# Altium PCB board.PcbDoc
Units mm, origin at the board's own origin, x right, y up, seen from the top; angles counter-clockwise.
Board outline 77 x 77 mm, 2 copper layers (Top Layer, Bottom Layer); 14 components, 20 nets, 100 pads, 2 vias.
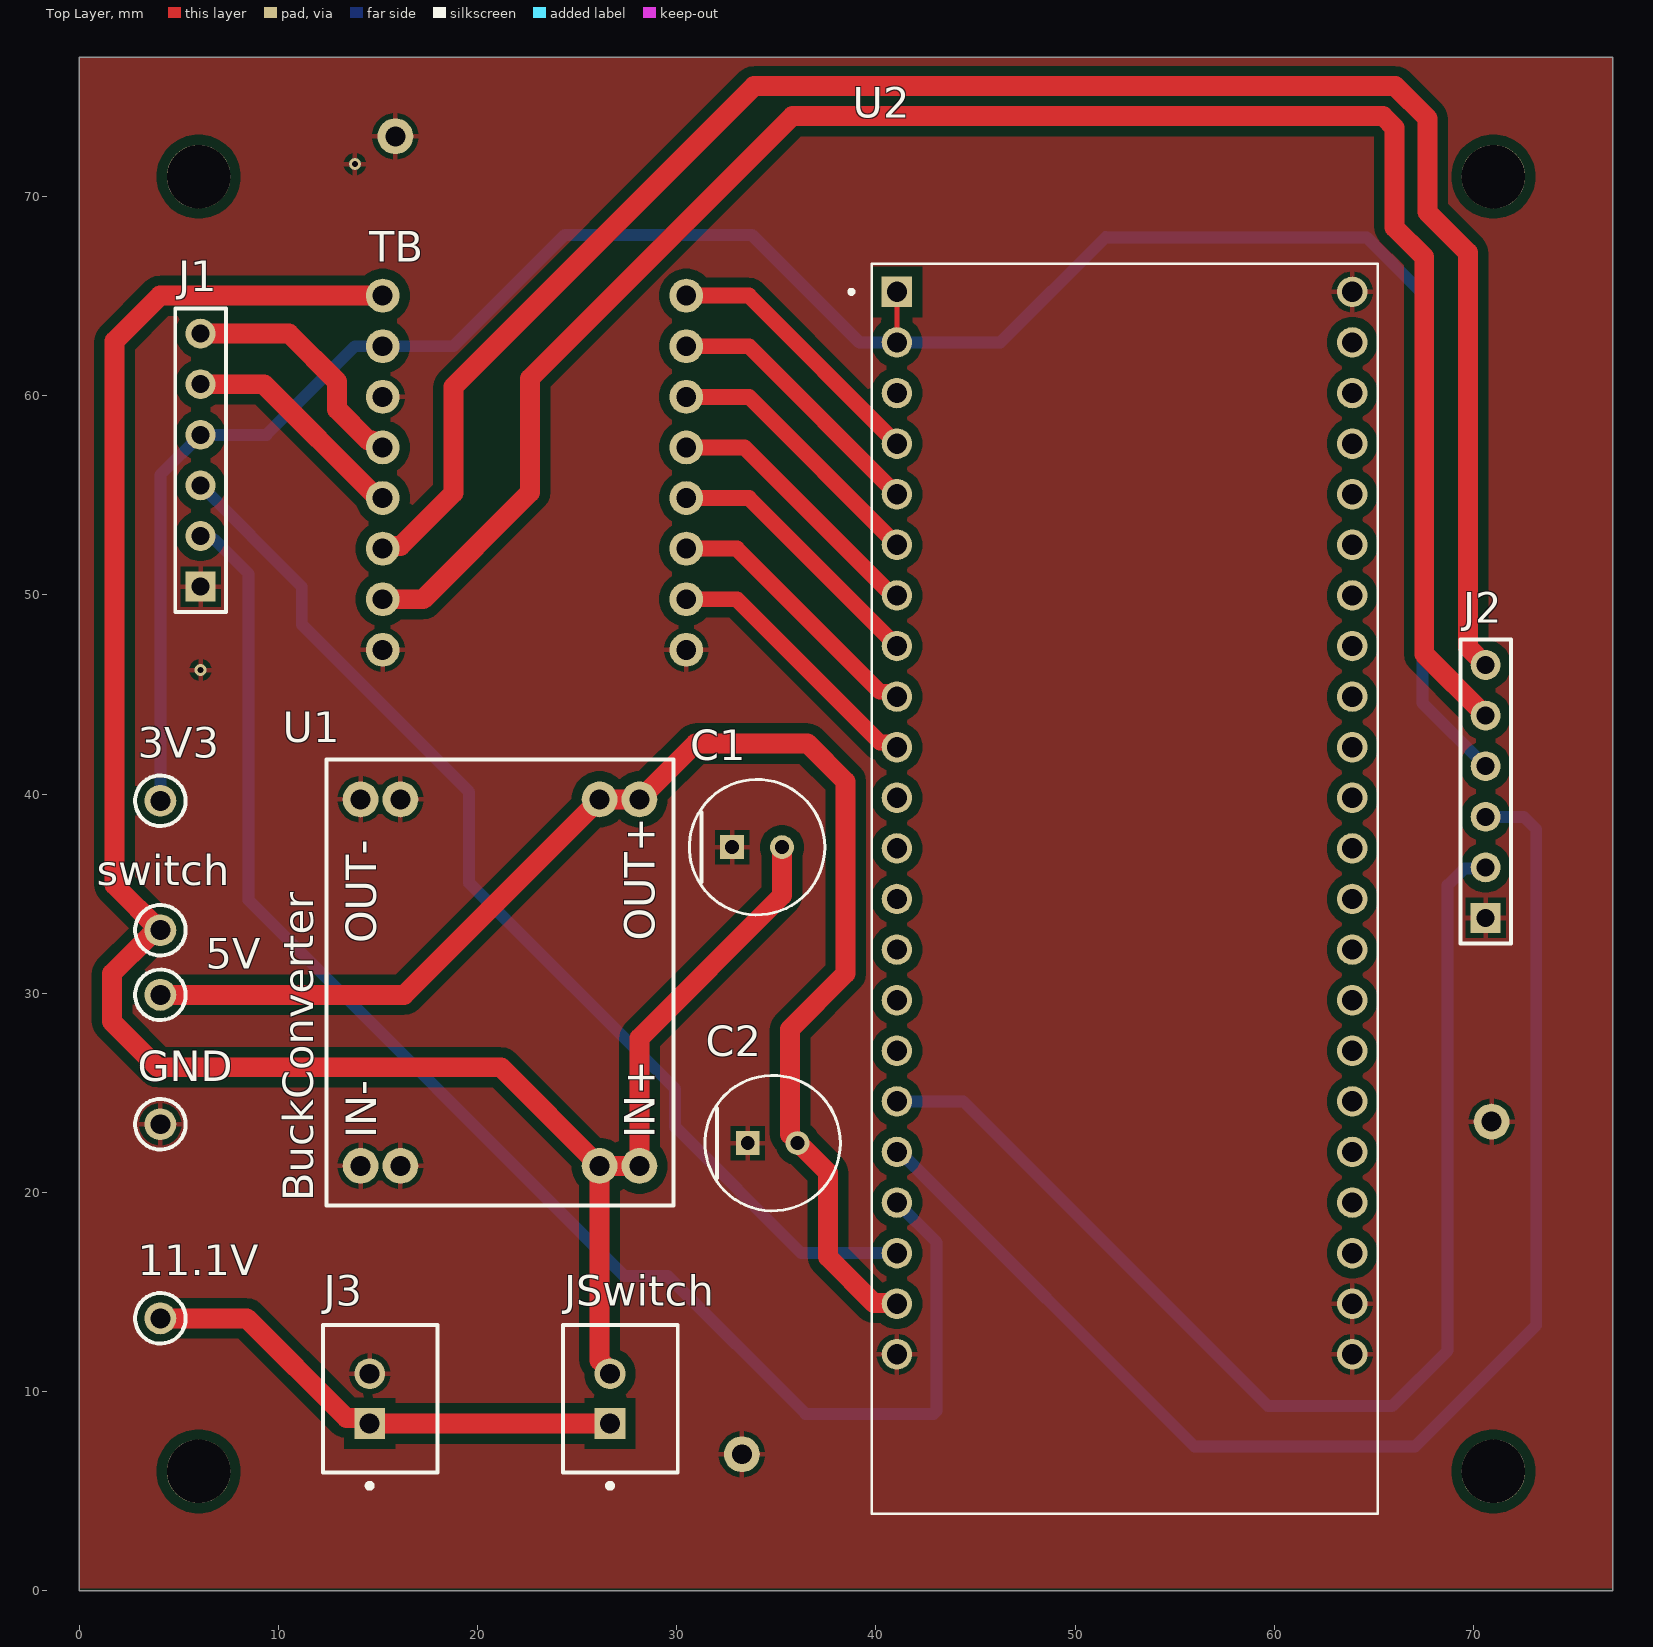
[diagram p0: Top Layer view]
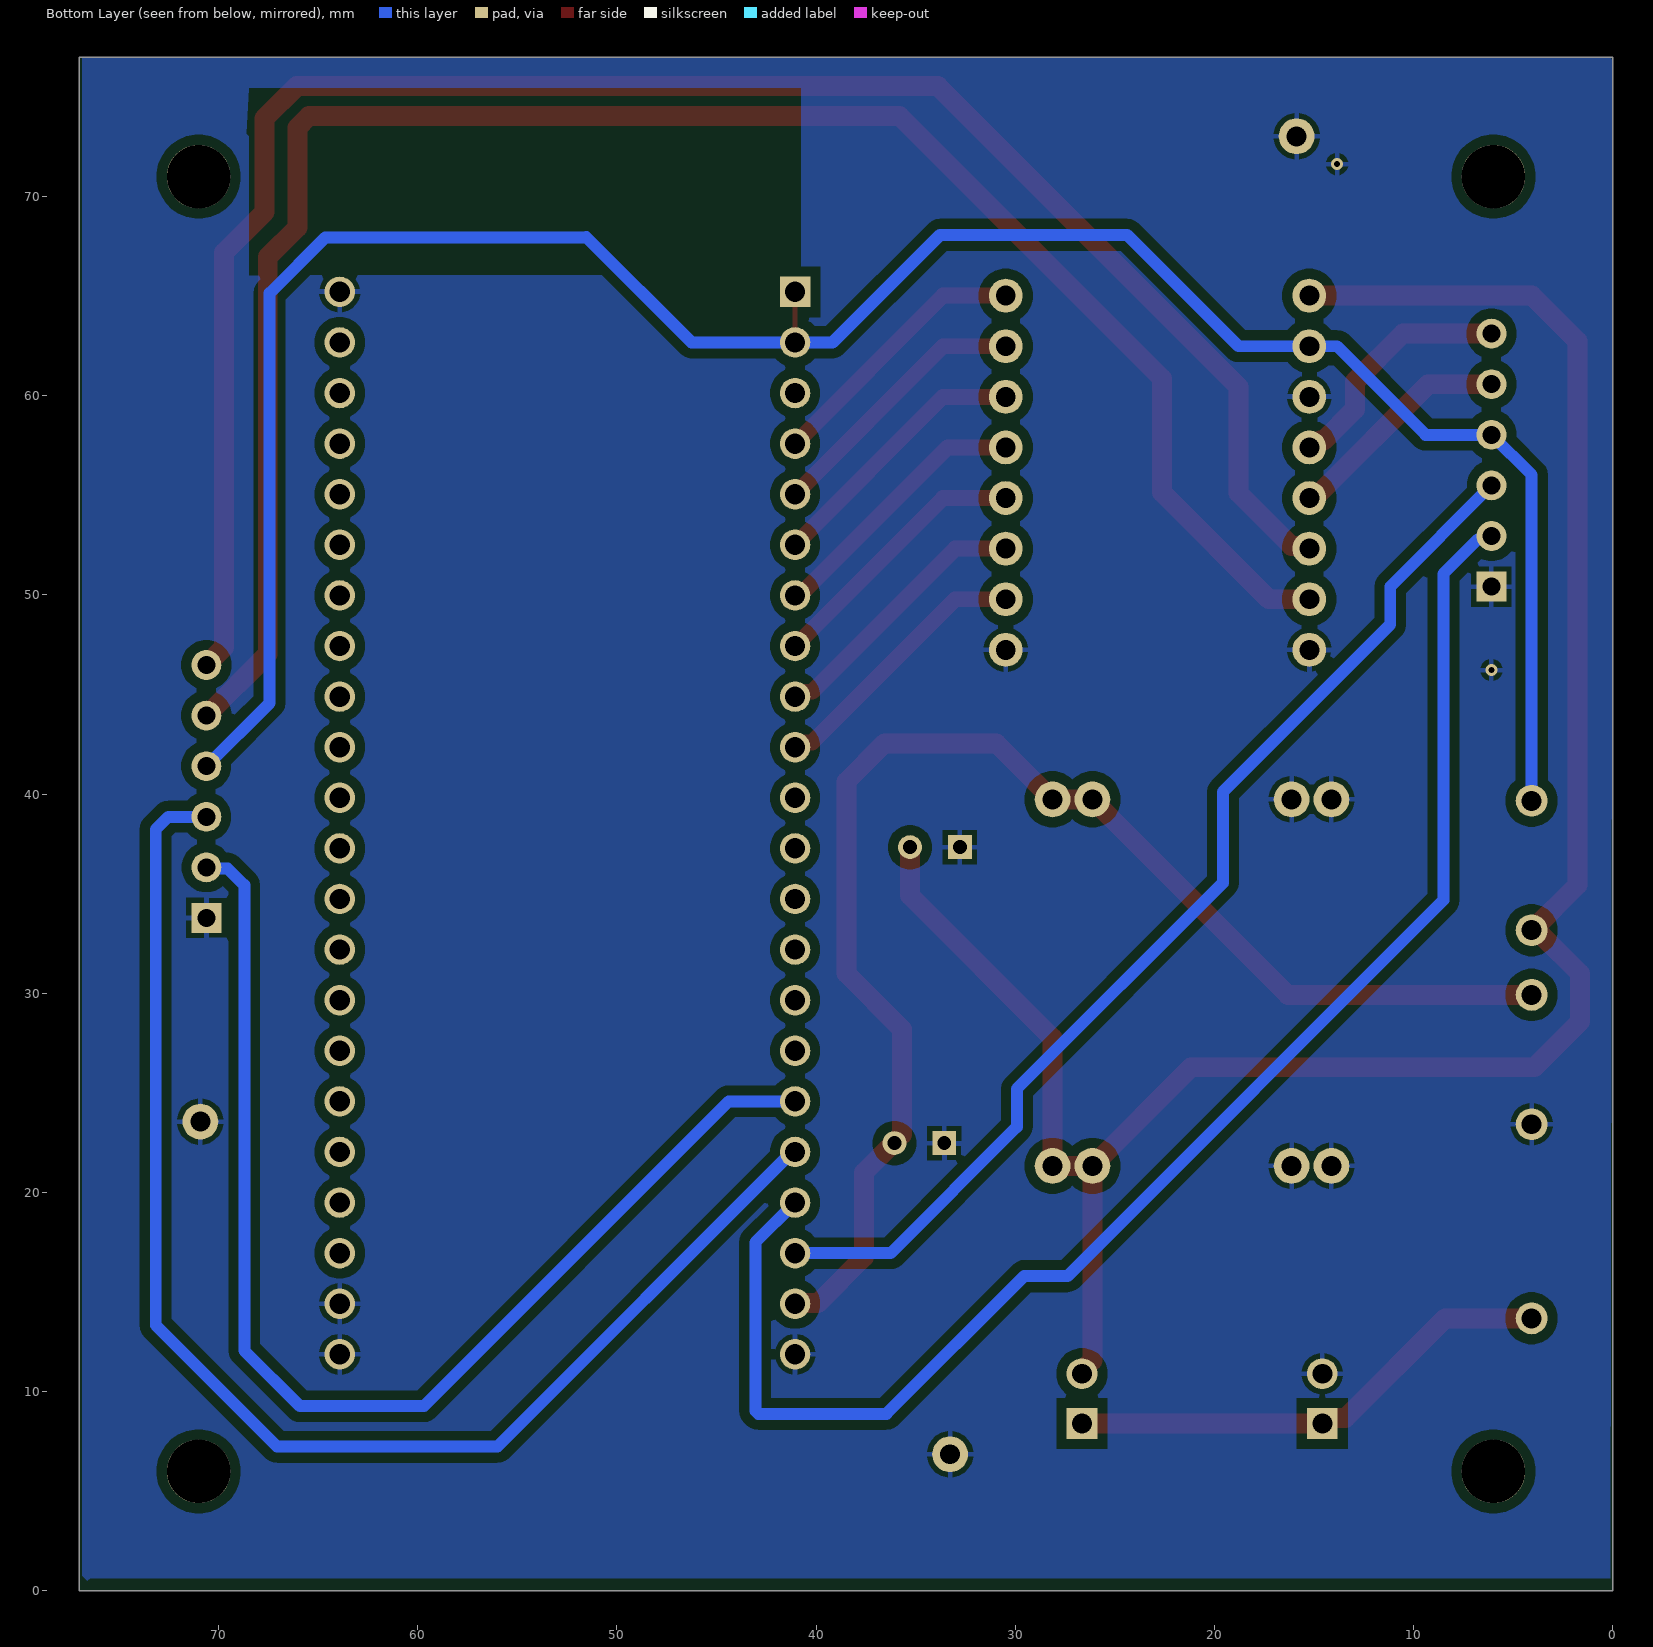
[diagram p1: Bottom Layer view, seen from below]
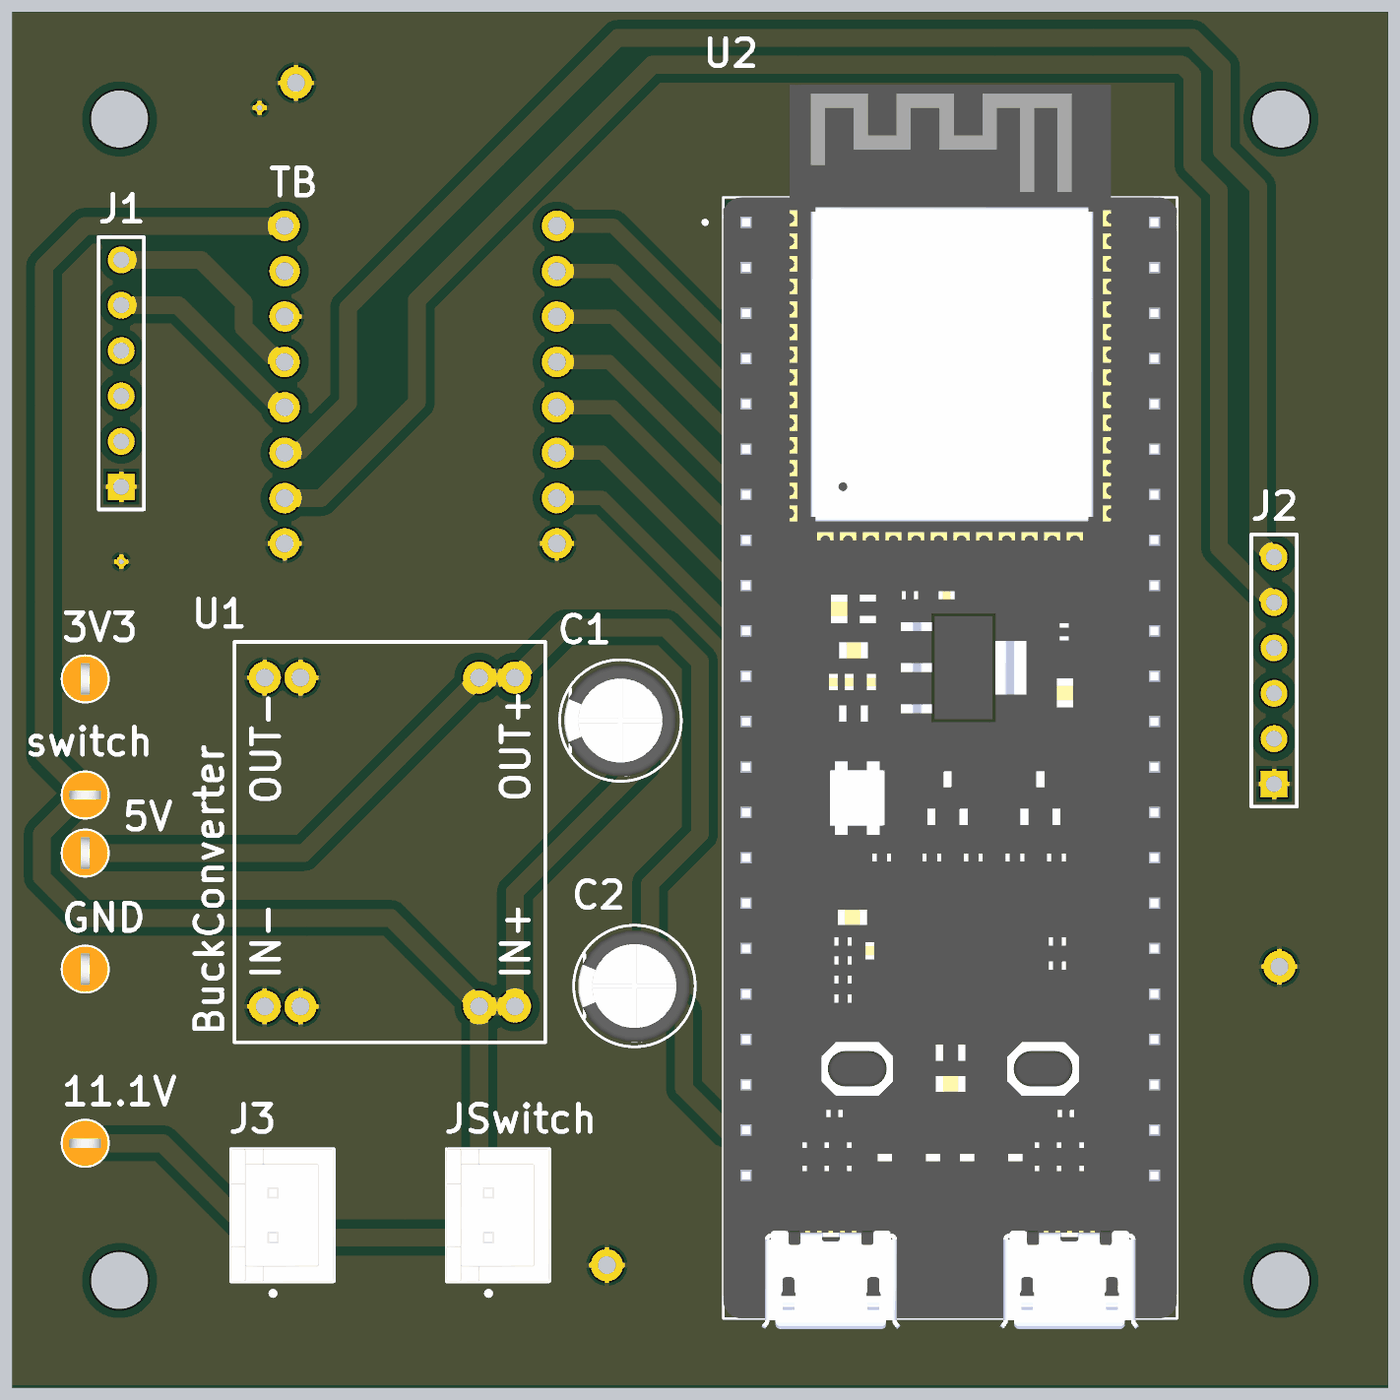
[diagram p2: 3D render of the assembled board from above, using the file's embedded part models]

## Layer stack, top to bottom
Top Solder: solder mask 0.0102, Solder Resist, Dk 3.5
Top Layer: signal copper 0.0356
Dielectric 1: dielectric 0.32, FR-4, Dk 4.8
Bottom Layer: signal copper 0.0356
Bottom Solder: solder mask 0.0102, Solder Resist, Dk 3.5

## Board outline
0,0 77,0 77,77 0,77

## Design rules (kind name [scope] priority, off if disabled: settings)
Clearance [All] p1: gap=0.5 ignorepadtopadclearanceinfootprint=FALSE
HoleSize [All] p1: absolutevalues=TRUE maxlimit=4 minlimit=0.025 maxpercent=80.000 minpercent=20.000
PolygonConnect [All] p1: connectstyle=Relief reliefconductorwidth=0.254 reliefentries=4 polygonreliefangle="90 Angle" airgapwidth=0.254
RoutingVias [All] p1: holewidth=0.711 width=1.27 viastyle="Through Hole" minholewidth=0.711 minwidth=1.27 maxholewidth=0.711 maxwidth=1.27
SolderMaskExpansion [All] p1: expansion=0.102 istentingtop=FALSE
SupplyNets "Schematic Supply Nets" [InNet('GND')] p1: voltage=0.000
Width Power_Width [InNetClass('Power')] p1: maxlimit=1.5 minlimit=0.8 preferedwidth=1 minimp=50.000000 maximp=50.000000 favimp=50.000000
Width [All] p2: maxlimit=1.2 minlimit=0.2 preferedwidth=0.254 minimp=50.000000 maximp=50.000000 favimp=50.000000
29 further rules are at their usual default settings.

## Classes and differential pairs
net class Power: 5V A01 A02 B01 B02 VS VV

## Components (designator, comment, footprint, x,y, rotation, side; value= is the part's Value field where it differs from the comment)
3V3 "3V3" Test-Pin-TH 4.081,39.665 r90 top
5V "5V" Test-Pin-TH 4.081,29.921 r90 top
11.1V "11.1V" Test-Pin-TH 4.081,13.681 r180 top
C1 "100 µF 25 V ELECTRO" FP-RAD-TH-D_6_3_0_5-L_11-MFG 34.036,37.338 r0 top
C2 "22 µF 10 V Ceramic" FP-RAD-TH-D_6_3_0_5-L_11-MFG 34.818,22.479 r0 top
GND "GND" Test-Pin-TH 4.081,23.425 r90 top
J1 "Header 6" HDR1X6 6.096,50.419 r90 top
J2 "Header 6" HDR1X6 70.612,33.782 r90 top
J3 "B2B-XH-A(LF)(SN)" FP-B2B-XH-A_LF_SN-MFG 15.113,9.652 r90 top
JSwitch "B2B-XH-A(LF)(SN)" FP-B2B-XH-A_LF_SN-MFG 27.178,9.652 r90 top
switch "11.1V" Test-Pin-TH 4.081,33.169 r180 top
TB "Tb6612FNG" TB6612FNG 12.7,44.704 r0 top
U1 "5V Buck 3A" BUCK_MINI_3A 28.129,21.336 r90 top
U2 "ESP32-S3-DEVKITC-1-N16R8V" XCVR_ESP32-S3-DEVKITC-1-N16R8V 52.488,35.245 r0 top

## Footprints (in the part's own frame and the unit in brackets; to place one, negate y for a bottom-side part, rotate by r counter-clockwise, add the part's x,y. Pads: shape width x height; smd on the part's side, far side on the other; paste and mask are expansions set on the pad)
BUCK_MINI_3A [mm]
  round 1.8 hole 1: 1(0,2) 1(0,0) 2(0,14) 2(0,12) 3(18.4,0) 3(18.4,2) 4(18.4,12) 4(18.4,14)
  silkscreen extent -2,-1.7 20.4,15.7
FP-B2B-XH-A_LF_SN-MFG [mm]
  rect 1.55x1.55 hole 1 paste-2539.97 mask+0: 1(-1.25,0.525)
  round 1.55 hole 1 paste-2539.97 mask+0: 2(1.25,0.525)
  silkscreen extent -4.5,-2.88 3.7,2.88, body extent -3.8,-2.98 3.8,2.98, height 0.25
FP-RAD-TH-D_6_3_0_5-L_11-MFG [mm]
  rect 1.2x1.2 hole 0.7 paste-2539.97 mask+0: 1(-1.25,0)
  round 1.2 hole 0.7 paste-2539.97 mask+0: 2(1.25,0)
  silkscreen extent -3.4,-3.4 3.4,3.4, body extent -3.5,-3.5 3.5,3.5, height 0.25
HDR1X6 [mm] "Connector; Header; 6 Position"
  rect 1.5x1.5 hole 0.9: 1(0,0)
  round 1.5 hole 0.9: 2(2.54,0) 3(5.08,0) 4(7.62,0) 5(10.16,0) 6(12.7,0)
  silkscreen extent -1.27,-1.27 13.97,1.27
TB6612FNG [mm]
  round 1.7 hole 1: 1(2.54,2.54) 2(2.54,5.08) 3(2.54,7.62) 4(2.54,10.16) 5(2.54,12.7) 6(2.54,15.24) 7(2.54,17.78) 8(2.54,20.32) 9(17.78,2.54) 10(17.78,5.08) 11(17.78,7.62) 12(17.78,10.16) 13(17.78,12.7) 14(17.78,15.24) 15(17.78,17.78) 16(17.78,20.32)
Test-Pin-TH [mm]
  round 1.6 hole 1: 1(0,0)
  silkscreen extent -1.27,-1.27 1.27,1.27, body extent -1.27,-1.27 1.27,1.27, height 4.57
XCVR_ESP32-S3-DEVKITC-1-N16R8V [mm]
  rect 1.53x1.53 / inner round 1.53 / far side rect 1.53x1.53 hole 1.02 mask+0.102: J1_1(-11.43,29.97)
  round 1.53 hole 1.02 mask+0.102: J1_2(-11.43,27.43) J1_3(-11.43,24.89) J1_4(-11.43,22.35) J1_5(-11.43,19.81) J1_6(-11.43,17.27) J1_7(-11.43,14.73) J1_8(-11.43,12.19) J1_9(-11.43,9.65) J1_10(-11.43,7.11) J1_11(-11.43,4.57) J1_12(-11.43,2.03) J1_13(-11.43,-0.51) J1_14(-11.43,-3.05) J1_15(-11.43,-5.59) J1_16(-11.43,-8.13) J1_17(-11.43,-10.67) J1_18(-11.43,-13.21) J1_19(-11.43,-15.75) J1_20(-11.43,-18.29) J1_21(-11.43,-20.83) J1_22(-11.43,-23.37) J3_1(11.43,29.97) J3_2(11.43,27.43) J3_3(11.43,24.89) J3_4(11.43,22.35) J3_5(11.43,19.81) J3_6(11.43,17.27) J3_7(11.43,14.73) J3_8(11.43,12.19) J3_9(11.43,9.65) J3_10(11.43,7.11) J3_11(11.43,4.57) J3_12(11.43,2.03) J3_13(11.43,-0.51) J3_14(11.43,-3.05) J3_15(11.43,-5.59) J3_16(11.43,-8.13) J3_17(11.43,-10.67) J3_18(11.43,-13.21) J3_19(11.43,-15.75) J3_20(11.43,-18.29) J3_21(11.43,-20.83) J3_22(11.43,-23.37)
  silkscreen extent -13.82,-31.37 12.7,31.37, body extent -12.7,-31.96 12.7,37.68, height 7.39

## Part data
3V3 5V 11.1V GND switch: library part CMP-00024-1, "Test pin TH generic"
C1 C2: library part CMP-05427-001480-1, "Aluminum Electrolytic Capacitors (Radial Lead Type) 100uF ±20% 25V"
J1 J2: "Header, 6-Pin", LatestRevisionDate=17-Jul-2002, LatestRevisionNote="Re-released for DXP Platform.", Publisher="Altium Limited"
J3 JSwitch: library part CMP-2000-05888-3, "CONN HEADER VERT 2POS 2.5MM", Color=Natural, Contact Resistance=20mR, Current Rating=3A, Housing Color=White, Insulation Resistance=1GR, Max Operating Temperature=85°C, Max Voltage Rating (AC)=250V, Min Operating Temperature=-25°C, Connector Type="Male Pin", Contact Material=Brass, Contact Plating=Tin, Contact Type="Male Pin", Depth=5.75mm, Fastening Type=Detent, Housing Material=Polyamide, Lead Free="Lead Free", Lead Pitch=2.5mm, Length=7.4mm, Max Current Rating=3A, Max Voltage Rating (DC)=250V, Mount="Through Hole", Number of Contacts=2, Number of Positions=2, Number of Rows=1, Orientation=Straight, Packaging=Bulk, Pitch=2.5mm, REACH SVHC="No SVHC", Series=XH, Termination=Solder, Voltage Rating=250V, Voltage Rating (AC)=250V, Wire/Cable Gauge=22AWG
U1: library part BUCK_5V_3A
U2: "Development Boards & Kits - Wireless Gen-Purpose Dev Board, embeds ESP32-S3-WROOM-2-N16R8V, 16 MB Octal Flash, 8 MB Octal PSRAM, with Pin Header", Package=None, Check_prices=https://www.snapeda.com/parts/ESP32-S3-DEVKITC-1-N16R8V/Espressif+Systems/view-part/?ref=eda, MF="Espressif Systems", MP=ESP32-S3-DEVKITC-1-N16R8V, SnapEDA_Link=https://www.snapeda.com/parts/ESP32-S3-DEVKITC-1-N16R8V/Espressif+Systems/view-part/?ref=snap

## Free pads (board coordinates)
  round 3.2 hole 3.2 unplated: hole(6,71) hole1(6,6) hole2(71,6) hole3(71,71)
  round 1.8 hole 1: TP_GND1(70.914,23.559) TP_GND2(33.274,6.858) TP_GND3(15.875,73.025)

## Via types
v1: diameter 0.6, hole 0.3, Top Layer to Bottom Layer, 2 vias

## Nets (pads, with @x,y where several pads share a name; then routed paths per layer and width w, separated by ;. In a path a pad name is that pad's centre, name@x,y a point inside that pad or via, vN(x,y) a via of type N, cw(c..) or ccw(c..) an arc to the next point about the centre after c; other vN are vias at no path point)
3V3: 3V3.1 J1.4 J2.4 TB.7 U2.J1_1 U2.J1_2 | length 117.9
  Top Layer w0.254: U2.J1_2 U2.J1_1
  Bottom Layer w0.6: 3V3.1 4.081,56.024 J1.4 9.398,58.039 13.843,62.484 TB.7 18.796,62.484 24.384,68.072 33.782,68.072 39.179,62.675 U2.J1_2 46.249,62.675 51.54,67.967 51.562,67.945 64.643,67.945 67.437,65.151 67.437,44.577 J2.4
5V: 5V.1 C2.2 U1.3 U2.J1_21 | length 70.7
  Top Layer w1: 5V.1 16.314,29.921 26.129,39.736 28.129,39.736 30.938,42.545 36.576,42.545 38.481,40.64 38.481,30.988 35.687,28.194 35.687,22.914 C2.2@36.068,22.533 ; C2.2 C2.2@36.068,22.533 ; U2.J1_21 41.015,14.458 39.898,14.458 37.592,16.764 37.592,21.009 C2.2@36.068,22.533
A01: J1.6 TB.5 | length 12.3
  Top Layer w1: J1.6 10.541,63.119 12.954,60.706 12.954,59.318 14.518,57.754 14.701,57.754 15.051,57.404 TB.5
A02: J1.5 TB.4 | length 11.5
  Top Layer w1: J1.5 9.271,60.579 14.852,54.998 15.106,54.998 TB.4
AIN1: TB.14 U2.J1_6 | length 13.7
  Top Layer w0.8: TB.14 33.629,59.944 U2.J1_6
AIN2: TB.15 U2.J1_5 | length 13.7
  Top Layer w0.8: TB.15 33.629,62.484 U2.J1_5
B01: J2.5 TB.2 | length 95.8
  Top Layer w1: TB.2 17.272,49.784 22.641,55.153 22.641,60.868 35.814,74.041 65.454,74.041 66.04,73.455 66.04,68.453 67.532,66.961 67.532,47.022 J2.5
B02: J2.6 TB.3 | length 94.5
  Top Layer w1: TB.3 15.374,52.458 16.136,52.458 18.796,55.118 18.796,60.452 33.885,75.541 66.076,75.541 67.691,73.926 67.691,69.215 69.723,67.183 69.723,47.371 J2.6
BIN1: TB.12 U2.J1_8 | length 13.7
  Top Layer w0.8: TB.12 33.629,54.864 U2.J1_8
BIN2: TB.11 U2.J1_9 | length 13.7
  Top Layer w0.8: TB.11 33.02,52.324 40.204,45.14 40.814,45.14 U2.J1_9
ENC1_A: J1.2 U2.J1_19 | length 76.2
  Bottom Layer w0.6: J1.2 6.268,52.787 6.776,52.787 8.509,51.054 8.509,34.671 27.371,15.809 29.551,15.809 36.471,8.89 42.904,8.89 43.053,9.039 43.053,17.5 U2.J1_19
ENC1_B: J1.3 U2.J1_20 | length 55.8
  Bottom Layer w0.6: J1.3 11.176,50.419 11.176,48.514 19.572,40.118 19.572,35.546 29.918,25.2 29.918,23.295 36.258,16.955 U2.J1_20
ENC2_A: J2.2 U2.J1_17 | length 60.8
  Bottom Layer w0.6: U2.J1_17 44.386,24.575 59.69,9.271 65.913,9.271 68.707,12.065 68.707,35.433 69.537,36.263 70.553,36.263 J2.2
ENC2_B: J2.3 U2.J1_18 | length 68.4
  Bottom Layer w0.6: U2.J1_18 41.211,22.035 56.007,7.239 67.056,7.239 73.152,13.335 73.152,38.227 72.517,38.862 J2.3
GND: C1.1 C2.1 GND.1 J1.1 J2.1 J3.2 pad.TP_GND1 pad.TP_GND2 pad.TP_GND3 TB.1 TB.6 TB.9 U1.2 U1.4 U2.J1_22 U2.J3_1 U2.J3_21 U2.J3_22
  other v1: 6.096,46.228 13.843,71.628
PWMA: TB.16 U2.J1_4 | length 13.7
  Top Layer w0.8: TB.16 33.629,65.024 U2.J1_4
PWMB: TB.10 U2.J1_10 | length 13.7
  Top Layer w0.8: TB.10 33.02,49.784 40.204,42.6 40.814,42.6 U2.J1_10
STBY: TB.13 U2.J1_7 | length 13.7
  Top Layer w0.8: TB.13 33.401,57.404 40.83,49.975 U2.J1_7
VS: C1.2 JSwitch.2 switch.1 TB.8 U1.1 | length 109.8
  Top Layer w1: TB.8 4.064,65.024 1.778,62.738 1.778,35.433 4.042,33.169 switch.1 3.919,33.169 3.619,32.869 3.532,32.869 1.651,30.988 1.651,28.575 3.937,26.289 21.176,26.289 U1.1@26.129,21.336 ; JSwitch.2 26.653,11.051 26.129,11.575 U1.1@26.129,21.336 ; C1.2 35.286,34.905 28.129,27.748 28.129,21.336 U1.1@26.129,21.336
VV: 11.1V.1 J3.1 JSwitch.1 | length 24.8
  Top Layer w1: 11.1V.1 8.417,13.681 13.421,8.677 14.313,8.677 J3.1 JSwitch.1
pads on no net: U2.J1_3 U2.J1_11 U2.J1_12 U2.J1_13 U2.J1_14 U2.J1_15 U2.J1_16 U2.J3_2 U2.J3_3 U2.J3_4 U2.J3_5 U2.J3_6 U2.J3_7 U2.J3_8 U2.J3_9 U2.J3_10 U2.J3_11 U2.J3_12 U2.J3_13 U2.J3_14 U2.J3_15 U2.J3_16 U2.J3_17 U2.J3_18 U2.J3_19 U2.J3_20

## Polygon pours and split planes (outlines as drawn)
GND on Top Layer "GND_L01_P001" (solid, remove dead copper, pour order 1): 0,76.962 76.962,76.962 76.962,0.127 0,0.127
GND on Bottom Layer "GND_L02_P000" (solid, remove dead copper, pour order 0): 0,76.962 76.835,76.962 76.835,0.762 76.581,0.508 76.454,0.635 0.127,0.635

## Other copper
Bottom Layer:
  pour cut-out: 40.767,66.04 40.767,75.438 68.453,75.438 68.58,73.152 68.453,73.025 68.453,66.04 40.513,66.04

## Silkscreen, mask and mechanical layers (free items; w line width, h text height)
Mechanical 1:
  the board outline again, w0.2

## Text inside footprints (layer, text, board x,y; h text height)
U1: Top Overlay "OUT+" at 28.891,32.639 h1.52 r90; Top Overlay "OUT-" at 14.921,32.512 h1.52 r90; Top Overlay "IN+" at 28.891,22.733 h1.52 r90; Top Overlay "IN-" at 14.921,22.733 h1.52 r90; Top Overlay "BuckConverter" at 11.746,19.558 h1.52 r90